# Allegro board KPRD_03v2.brd
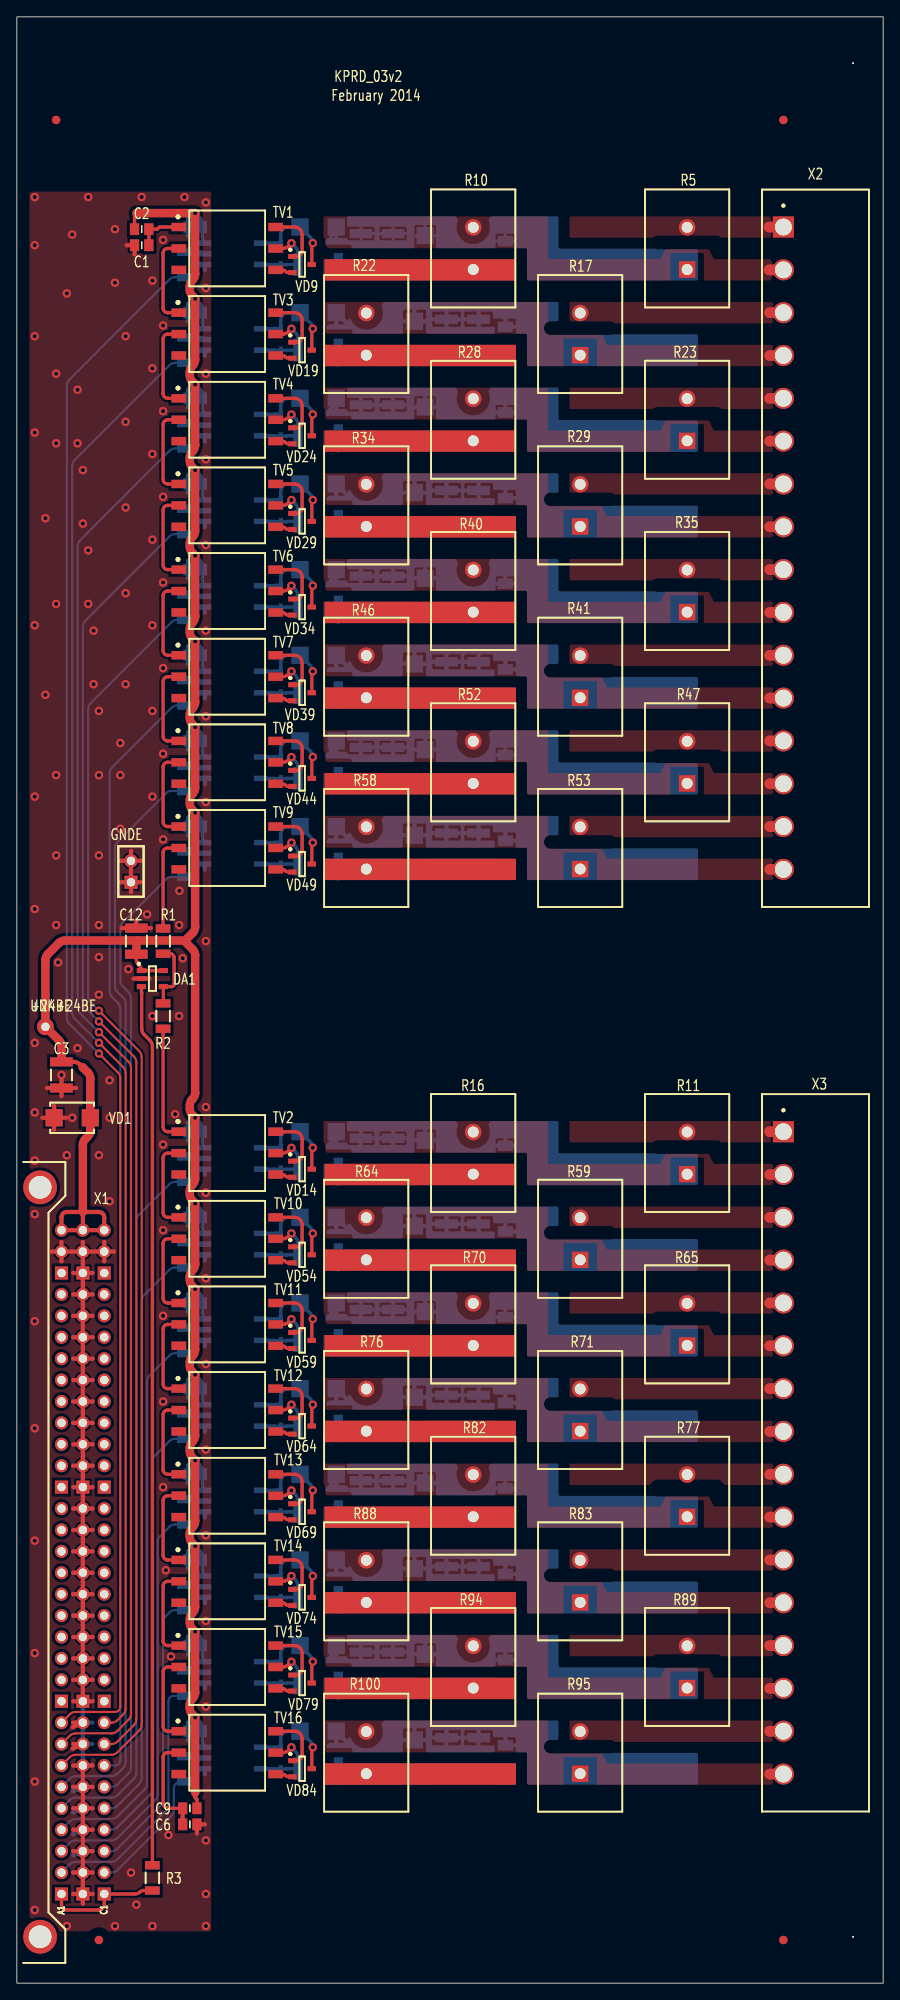
[diagram p0: board, top side]
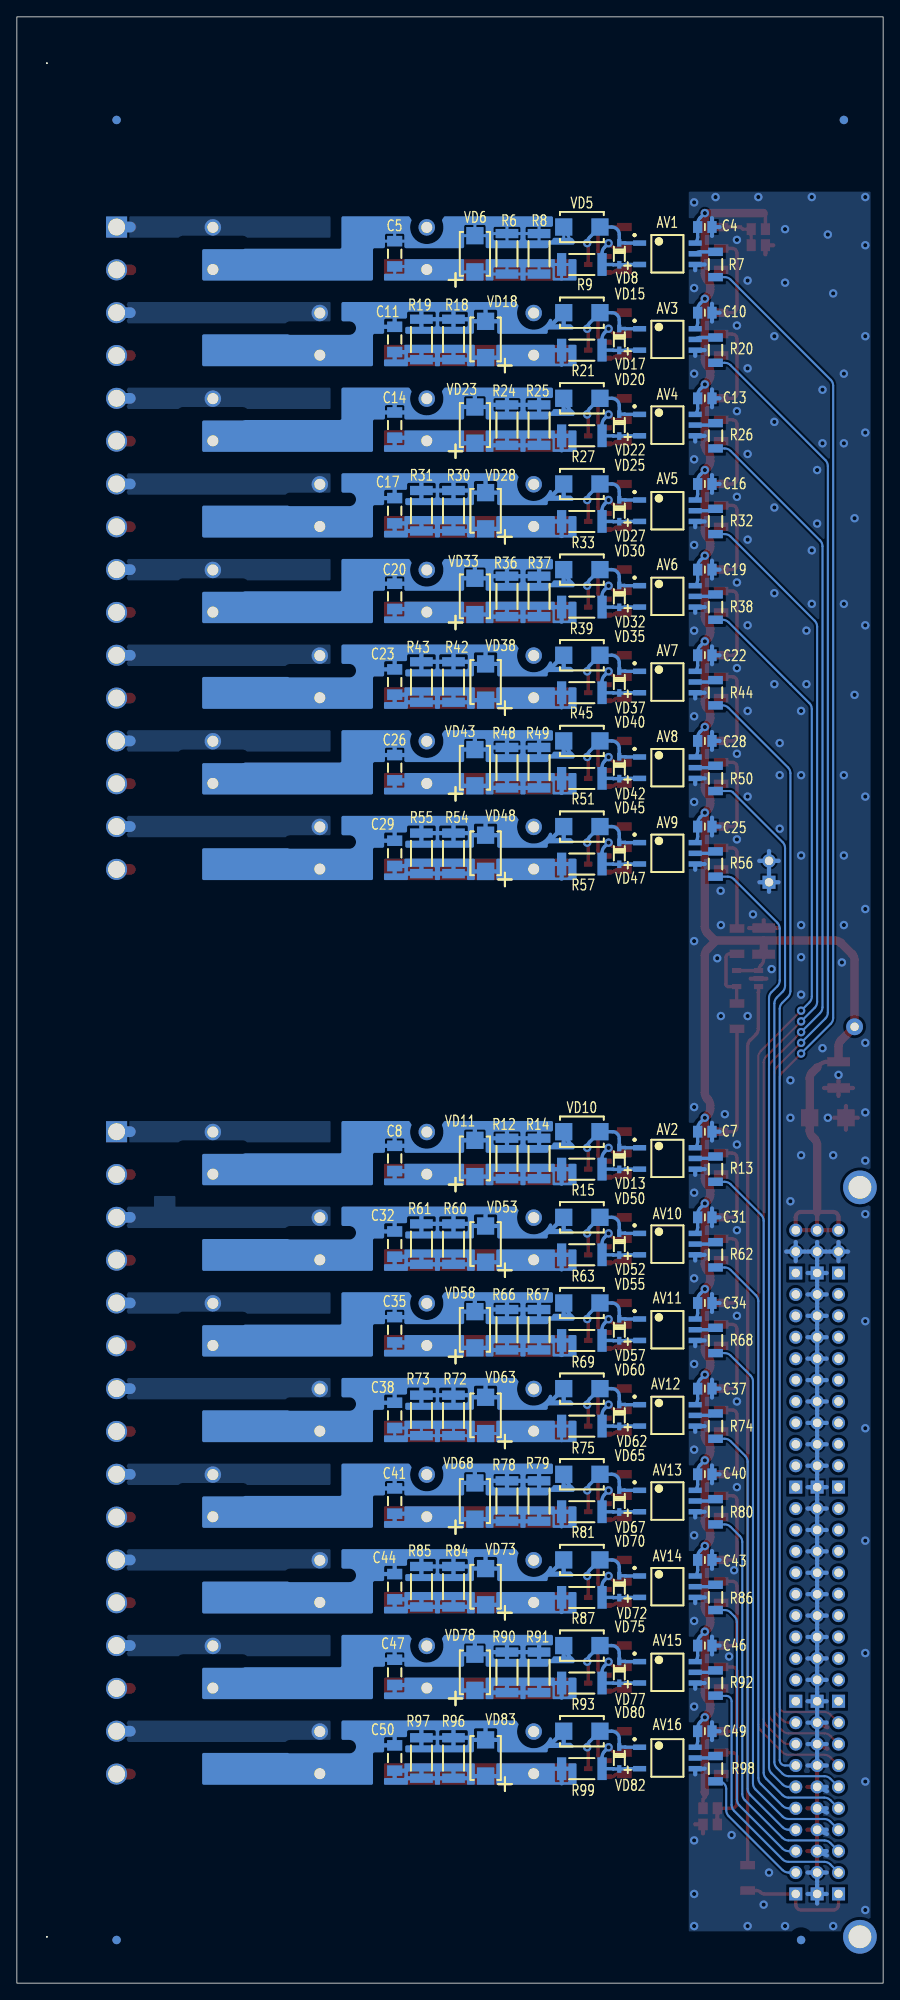
[diagram p1: board, bottom side, seen from below]

Outline 102.87 x 233.25 mm; copper layers: TOP, BOTTOM. Coordinates in mm from the lower left corner of the outline.
Outline path: rectangle 0,0 102.87,233.25

## Design rules (mm)
net group IN+: nets +IN1 +IN2 +IN3 +IN4 +IN5 +IN6 +IN7 +IN8 +IN9 +IN10 +IN11 +IN12 +IN13 +IN14 +IN15 +IN16
net group IN-: nets -IN1 -IN2 -IN3 -IN4 -IN5 -IN6 -IN7 -IN8 -IN9 -IN10 -IN11 -IN12 -IN13 -IN14 -IN15 -IN16
nets with their own width: min track width 0.4; nets +24BE

## Placement (name value [footprint] x y rotation side)
AV1  ACPL-M50L-500E  [SOIC127P650X260-5]  25.62 205.14 180 bottom
AV2  ACPL-M50L-500E  [SOIC127P650X260-5]  25.62 97.83 180 bottom
AV3  ACPL-M50L-500E  [SOIC127P650X260-5]  25.62 194.98 180 bottom
AV4  ACPL-M50L-500E  [SOIC127P650X260-5]  25.62 184.82 180 bottom
AV5  ACPL-M50L-500E  [SOIC127P650X260-5]  25.62 174.66 180 bottom
AV6  ACPL-M50L-500E  [SOIC127P650X260-5]  25.62 164.5 180 bottom
AV7  ACPL-M50L-500E  [SOIC127P650X260-5]  25.62 154.34 180 bottom
AV8  ACPL-M50L-500E  [SOIC127P650X260-5]  25.62 144.18 180 bottom
AV9  ACPL-M50L-500E  [SOIC127P650X260-5]  25.62 134.02 180 bottom
AV10  ACPL-M50L-500E  [SOIC127P650X260-5]  25.62 87.67 180 bottom
AV11  ACPL-M50L-500E  [SOIC127P650X260-5]  25.62 77.51 180 bottom
AV12  ACPL-M50L-500E  [SOIC127P650X260-5]  25.62 67.35 180 bottom
AV13  ACPL-M50L-500E  [SOIC127P650X260-5]  25.62 57.19 180 bottom
AV14  ACPL-M50L-500E  [SOIC127P650X260-5]  25.62 47.03 180 bottom
AV15  ACPL-M50L-500E  [SOIC127P650X260-5]  25.62 36.87 180 bottom
AV16  ACPL-M50L-500E  [SOIC127P650X260-5]  25.62 26.71 180 bottom
C1  0.1u  [CAPC2013X95N]  14.82 206.16 180 top
C2  0.1u  [CAPC2013X95N]  14.82 208.07 180 top
C3  10.0u  [CAPC3225X270N]  5.3 107.73 270 top
C4  0.1u  [CAPC2013X95N]  21.18 208.32 180 bottom
C5  0.1u  [CAPC3216X145N]  58 205.14 270 bottom
C6  0.1u  [CAPC2013X95N]  20.54 18.84 0 top
C7  0.1u  [CAPC2013X95N]  21.18 101 180 bottom
C8  0.1u  [CAPC3216X145N]  58 97.83 270 bottom
C9  0.1u  [CAPC2013X95N]  20.54 20.74 0 top
C10  0.1u  [CAPC2013X95N]  21.18 198.16 180 bottom
C11  0.1u  [CAPC3216X145N]  58 194.98 270 bottom
C12  10.0u  [CAPC3225X270N]  14.19 123.61 90 top
C13  0.1u  [CAPC2013X95N]  21.18 188 180 bottom
C14  0.1u  [CAPC3216X145N]  58 184.82 270 bottom
C16  0.1u  [CAPC2013X95N]  21.18 177.84 180 bottom
C17  0.1u  [CAPC3216X145N]  58 174.66 270 bottom
C19  0.1u  [CAPC2013X95N]  21.18 167.68 180 bottom
C20  0.1u  [CAPC3216X145N]  58 164.5 270 bottom
C22  0.1u  [CAPC2013X95N]  21.18 157.52 180 bottom
C23  0.1u  [CAPC3216X145N]  58 154.34 270 bottom
C25  0.1u  [CAPC2013X95N]  21.18 137.2 180 bottom
C26  0.1u  [CAPC3216X145N]  58 144.18 270 bottom
C28  0.1u  [CAPC2013X95N]  21.18 147.36 180 bottom
C29  0.1u  [CAPC3216X145N]  58 134.02 270 bottom
C31  0.1u  [CAPC2013X95N]  21.18 90.84 180 bottom
C32  0.1u  [CAPC3216X145N]  58 87.67 270 bottom
C34  0.1u  [CAPC2013X95N]  21.18 80.68 180 bottom
C35  0.1u  [CAPC3216X145N]  58 77.51 270 bottom
C37  0.1u  [CAPC2013X95N]  21.18 70.52 180 bottom
C38  0.1u  [CAPC3216X145N]  58 67.35 270 bottom
C40  0.1u  [CAPC2013X95N]  21.18 60.36 180 bottom
C41  0.1u  [CAPC3216X145N]  58 57.19 270 bottom
C43  0.1u  [CAPC2013X95N]  21.18 50.2 180 bottom
C44  0.1u  [CAPC3216X145N]  58 47.03 270 bottom
C46  0.1u  [CAPC2013X95N]  21.18 40.04 180 bottom
C47  0.1u  [CAPC3216X145N]  58 36.87 270 bottom
C49  0.1u  [CAPC2013X95N]  21.18 29.88 180 bottom
C50  0.1u  [CAPC3216X145N]  58 26.71 270 bottom
DA1  UCC27537  [SOT95P280X145-5N]  16.09 119.16 0 top
NOREF  -  [unnamed]  99.3 227.75 0 top
NOREF#2  -  [unnamed#2]  91.02 221.02 0 top
NOREF#3  -  [unnamed]  99.3 5.5 0 top
NOREF#4  -  [unnamed#2]  9.75 5.12 0 top
NOREF#5  -  [unnamed#2]  91.02 5.12 0 top
NOREF#6  -  [unnamed#2]  4.67 221.02 0 top
NOREF#7  -  [unnamed#2]  91.02 221.02 180 bottom
NOREF#8  -  [unnamed#2]  91.02 5.12 180 bottom
NOREF#9  -  [unnamed#2]  9.75 5.12 180 bottom
NOREF#10  -  [unnamed#2]  4.67 221.02 180 bottom
R1  200  [RESC3116X65N]  17.36 123.61 90 top
R2  200  [RESC3116X65N]  17.36 114.72 90 top
R3  200  [RESC3116X65N]  16.09 12.48 90 top
R5  5.1k  [RESV500P1300W900L2500H]  79.59 205.78 90 top
R6  1k  [RESC5025X65N]  44.67 205.14 90 bottom
R7  2k  [RESC3116X65N]  19.91 203.87 90 bottom
R8  1.2k  [RESC5025X65N]  40.86 205.14 90 bottom
R9  100  [RESC5025X65N]  35.78 203.87 0 bottom
R10  5.1k  [RESV500P1300W900L2500H]  54.2 205.78 90 top
R11  5.1k  [RESV500P1300W900L2500H]  79.59 98.46 90 top
R12  1k  [RESC5025X65N]  44.67 97.83 90 bottom
R13  2k  [RESC3116X65N]  19.91 96.56 90 bottom
R14  1.2k  [RESC5025X65N]  40.86 97.83 90 bottom
R15  100  [RESC5025X65N]  35.78 96.56 0 bottom
R16  5.1k  [RESV500P1300W900L2500H]  54.2 98.46 90 top
R17  5.1k  [RESV500P1300W900L2500H]  66.89 195.62 90 top
R18  1k  [RESC5025X65N]  51.02 194.98 90 bottom
R19  1.2k  [RESC5025X65N]  54.83 194.98 90 bottom
R20  2k  [RESC3116X65N]  19.91 193.71 90 bottom
R21  100  [RESC5025X65N]  35.78 193.71 0 bottom
R22  5.1k  [RESV500P1300W900L2500H]  41.49 195.62 90 top
R23  5.1k  [RESV500P1300W900L2500H]  79.59 185.46 90 top
R24  1k  [RESC5025X65N]  44.67 184.82 90 bottom
R25  1.2k  [RESC5025X65N]  40.86 184.82 90 bottom
R26  2k  [RESC3116X65N]  19.91 183.55 90 bottom
R27  100  [RESC5025X65N]  35.78 183.55 0 bottom
R28  5.1k  [RESV500P1300W900L2500H]  54.2 185.46 90 top
R29  5.1k  [RESV500P1300W900L2500H]  66.89 175.3 90 top
R30  1k  [RESC5025X65N]  51.02 174.66 90 bottom
R31  1.2k  [RESC5025X65N]  54.83 174.66 90 bottom
R32  2k  [RESC3116X65N]  19.91 173.39 90 bottom
R33  100  [RESC5025X65N]  35.78 173.39 0 bottom
R34  5.1k  [RESV500P1300W900L2500H]  41.49 175.3 90 top
R35  5.1k  [RESV500P1300W900L2500H]  79.59 165.14 90 top
R36  1k  [RESC5025X65N]  44.67 164.5 90 bottom
R37  1.2k  [RESC5025X65N]  40.86 164.5 90 bottom
R38  2k  [RESC3116X65N]  19.91 163.23 90 bottom
R39  100  [RESC5025X65N]  35.78 163.23 0 bottom
R40  5.1k  [RESV500P1300W900L2500H]  54.2 165.14 90 top
R41  5.1k  [RESV500P1300W900L2500H]  66.89 154.98 90 top
R42  1k  [RESC5025X65N]  51.02 154.34 90 bottom
R43  1.2k  [RESC5025X65N]  54.83 154.34 90 bottom
R44  2k  [RESC3116X65N]  19.91 153.07 90 bottom
R45  100  [RESC5025X65N]  35.78 153.07 0 bottom
R46  5.1k  [RESV500P1300W900L2500H]  41.49 154.98 90 top
R47  5.1k  [RESV500P1300W900L2500H]  79.59 144.82 90 top
R48  1k  [RESC5025X65N]  44.67 144.18 90 bottom
R49  1.2k  [RESC5025X65N]  40.86 144.18 90 bottom
R50  2k  [RESC3116X65N]  19.91 142.91 90 bottom
R51  100  [RESC5025X65N]  35.78 142.91 0 bottom
R52  5.1k  [RESV500P1300W900L2500H]  54.2 144.82 90 top
R53  5.1k  [RESV500P1300W900L2500H]  66.89 134.66 90 top
R54  1k  [RESC5025X65N]  51.02 134.02 90 bottom
R55  1.2k  [RESC5025X65N]  54.83 134.02 90 bottom
R56  2k  [RESC3116X65N]  19.91 132.75 90 bottom
R57  100  [RESC5025X65N]  35.78 132.75 0 bottom
R58  5.1k  [RESV500P1300W900L2500H]  41.49 134.66 90 top
R59  5.1k  [RESV500P1300W900L2500H]  66.89 88.3 90 top
R60  1k  [RESC5025X65N]  51.02 87.67 90 bottom
R61  1.2k  [RESC5025X65N]  54.83 87.67 90 bottom
R62  2k  [RESC3116X65N]  19.91 86.4 90 bottom
R63  100  [RESC5025X65N]  35.78 86.4 0 bottom
R64  5.1k  [RESV500P1300W900L2500H]  41.49 88.3 90 top
R65  5.1k  [RESV500P1300W900L2500H]  79.59 78.14 90 top
R66  1k  [RESC5025X65N]  44.67 77.51 90 bottom
R67  1.2k  [RESC5025X65N]  40.86 77.51 90 bottom
R68  2k  [RESC3116X65N]  19.91 76.24 90 bottom
R69  100  [RESC5025X65N]  35.78 76.24 0 bottom
R70  5.1k  [RESV500P1300W900L2500H]  54.2 78.14 90 top
R71  5.1k  [RESV500P1300W900L2500H]  66.89 67.98 90 top
R72  1k  [RESC5025X65N]  51.02 67.35 90 bottom
R73  1.2k  [RESC5025X65N]  54.83 67.35 90 bottom
R74  2k  [RESC3116X65N]  19.91 66.08 90 bottom
R75  100  [RESC5025X65N]  35.78 66.08 0 bottom
R76  5.1k  [RESV500P1300W900L2500H]  41.49 67.98 90 top
R77  5.1k  [RESV500P1300W900L2500H]  79.59 57.82 90 top
R78  1k  [RESC5025X65N]  44.67 57.19 90 bottom
R79  1.2k  [RESC5025X65N]  40.86 57.19 90 bottom
R80  2k  [RESC3116X65N]  19.91 55.92 90 bottom
R81  100  [RESC5025X65N]  35.78 55.92 0 bottom
R82  5.1k  [RESV500P1300W900L2500H]  54.2 57.82 90 top
R83  5.1k  [RESV500P1300W900L2500H]  66.89 47.66 90 top
R84  1k  [RESC5025X65N]  51.02 47.03 90 bottom
R85  1.2k  [RESC5025X65N]  54.83 47.03 90 bottom
R86  2k  [RESC3116X65N]  19.91 45.76 90 bottom
R87  100  [RESC5025X65N]  35.78 45.76 0 bottom
R88  5.1k  [RESV500P1300W900L2500H]  41.49 47.66 90 top
R89  5.1k  [RESV500P1300W900L2500H]  79.59 37.5 90 top
R90  1k  [RESC5025X65N]  44.67 36.87 90 bottom
R91  1.2k  [RESC5025X65N]  40.86 36.87 90 bottom
R92  2k  [RESC3116X65N]  19.91 35.6 90 bottom
R93  100  [RESC5025X65N]  35.78 35.6 0 bottom
R94  5.1k  [RESV500P1300W900L2500H]  54.2 37.5 90 top
R95  5.1k  [RESV500P1300W900L2500H]  66.89 27.34 90 top
R96  1k  [RESC5025X65N]  51.02 26.71 90 bottom
R97  1.2k  [RESC5025X65N]  54.83 26.71 90 bottom
R98  2k  [RESC3116X65N]  19.91 25.44 90 bottom
R99  100  [RESC5025X65N]  35.78 25.44 0 bottom
R100  5.1k  [RESV500P1300W900L2500H]  41.49 27.34 90 top
TV1  78253  [XFMR_78253MVC]  24.98 205.78 0 top
TV2  78253  [XFMR_78253MVC]  24.98 98.46 0 top
TV3  78253  [XFMR_78253MVC]  24.98 195.62 0 top
TV4  78253  [XFMR_78253MVC]  24.98 185.46 0 top
TV5  78253  [XFMR_78253MVC]  24.98 175.3 0 top
TV6  78253  [XFMR_78253MVC]  24.98 165.14 0 top
TV7  78253  [XFMR_78253MVC]  24.98 154.98 0 top
TV8  78253  [XFMR_78253MVC]  24.98 144.82 0 top
TV9  78253  [XFMR_78253MVC]  24.98 134.66 0 top
TV10  78253  [XFMR_78253MVC]  24.98 88.3 0 top
TV11  78253  [XFMR_78253MVC]  24.98 78.14 0 top
TV12  78253  [XFMR_78253MVC]  24.98 67.98 0 top
TV13  78253  [XFMR_78253MVC]  24.98 57.82 0 top
TV14  78253  [XFMR_78253MVC]  24.98 47.66 0 top
TV15  78253  [XFMR_78253MVC]  24.98 37.5 0 top
TV16  78253  [XFMR_78253MVC]  24.98 27.34 0 top
UNK+24BE  0.85mm  [MTG_085_200]  3.39 113.45 0 top
VD1  30B  [DIOM5236X261N_NP]  6.57 102.66 180 top
VD5  6.8B  [DIOM5236X261N_NP]  35.78 208.32 180 bottom
VD6  18B  [DIOM5236X261N]  48.48 205.14 270 bottom
VD8  1N4148WS  [SOD2513X100N]  31.34 205.14 270 bottom
VD9  BAT54C  [SOT95P230X110-3N]  33.88 203.87 0 top
VD10  6.8B  [DIOM5236X261N_NP]  35.78 101 180 bottom
VD11  18B  [DIOM5236X261N]  48.48 97.83 270 bottom
VD13  1N4148WS  [SOD2513X100N]  31.34 97.83 270 bottom
VD14  BAT54C  [SOT95P230X110-3N]  33.88 96.56 0 top
VD15  6.8B  [DIOM5236X261N_NP]  35.78 198.16 180 bottom
VD17  1N4148WS  [SOD2513X100N]  31.34 194.98 270 bottom
VD18  18B  [DIOM5236X261N]  47.21 194.98 270 bottom
VD19  BAT54C  [SOT95P230X110-3N]  33.88 193.71 0 top
VD20  6.8B  [DIOM5236X261N_NP]  35.78 188 180 bottom
VD22  1N4148WS  [SOD2513X100N]  31.34 184.82 270 bottom
VD23  18B  [DIOM5236X261N]  48.48 184.82 270 bottom
VD24  BAT54C  [SOT95P230X110-3N]  33.88 183.55 0 top
VD25  6.8B  [DIOM5236X261N_NP]  35.78 177.84 180 bottom
VD27  1N4148WS  [SOD2513X100N]  31.34 174.66 270 bottom
VD28  18B  [DIOM5236X261N]  47.21 174.66 270 bottom
VD29  BAT54C  [SOT95P230X110-3N]  33.88 173.39 0 top
VD30  6.8B  [DIOM5236X261N_NP]  35.78 167.68 180 bottom
VD32  1N4148WS  [SOD2513X100N]  31.34 164.5 270 bottom
VD33  18B  [DIOM5236X261N]  48.48 164.5 270 bottom
VD34  BAT54C  [SOT95P230X110-3N]  33.88 163.23 0 top
VD35  6.8B  [DIOM5236X261N_NP]  35.78 157.52 180 bottom
VD37  1N4148WS  [SOD2513X100N]  31.34 154.34 270 bottom
VD38  18B  [DIOM5236X261N]  47.21 154.34 270 bottom
VD39  BAT54C  [SOT95P230X110-3N]  33.88 153.07 0 top
VD40  6.8B  [DIOM5236X261N_NP]  35.78 147.36 180 bottom
VD42  1N4148WS  [SOD2513X100N]  31.34 144.18 270 bottom
VD43  18B  [DIOM5236X261N]  48.48 144.18 270 bottom
VD44  BAT54C  [SOT95P230X110-3N]  33.88 142.91 0 top
VD45  6.8B  [DIOM5236X261N_NP]  35.78 137.2 180 bottom
VD47  1N4148WS  [SOD2513X100N]  31.34 134.02 270 bottom
VD48  18B  [DIOM5236X261N]  47.21 134.02 270 bottom
VD49  BAT54C  [SOT95P230X110-3N]  33.88 132.75 0 top
VD50  6.8B  [DIOM5236X261N_NP]  35.78 90.84 180 bottom
VD52  1N4148WS  [SOD2513X100N]  31.34 87.67 270 bottom
VD53  18B  [DIOM5236X261N]  47.21 87.67 270 bottom
VD54  BAT54C  [SOT95P230X110-3N]  33.88 86.4 0 top
VD55  6.8B  [DIOM5236X261N_NP]  35.78 80.68 180 bottom
VD57  1N4148WS  [SOD2513X100N]  31.34 77.51 270 bottom
VD58  18B  [DIOM5236X261N]  48.48 77.51 270 bottom
VD59  BAT54C  [SOT95P230X110-3N]  33.88 76.24 0 top
VD60  6.8B  [DIOM5236X261N_NP]  35.78 70.52 180 bottom
VD62  1N4148WS  [SOD2513X100N]  31.34 67.35 270 bottom
VD63  18B  [DIOM5236X261N]  47.21 67.35 270 bottom
VD64  BAT54C  [SOT95P230X110-3N]  33.88 66.08 0 top
VD65  6.8B  [DIOM5236X261N_NP]  35.78 60.36 180 bottom
VD67  1N4148WS  [SOD2513X100N]  31.34 57.19 270 bottom
VD68  18B  [DIOM5236X261N]  48.48 57.19 270 bottom
VD69  BAT54C  [SOT95P230X110-3N]  33.88 55.92 0 top
VD70  6.8B  [DIOM5236X261N_NP]  35.78 50.2 180 bottom
VD72  1N4148WS  [SOD2513X100N]  31.34 47.03 270 bottom
VD73  18B  [DIOM5236X261N]  47.21 47.03 270 bottom
VD74  BAT54C  [SOT95P230X110-3N]  33.88 45.76 0 top
VD75  6.8B  [DIOM5236X261N_NP]  35.78 40.04 180 bottom
VD77  1N4148WS  [SOD2513X100N]  31.34 36.87 270 bottom
VD78  18B  [DIOM5236X261N]  48.48 36.87 270 bottom
VD79  BAT54C  [SOT95P230X110-3N]  33.88 35.6 0 top
VD80  6.8B  [DIOM5236X261N_NP]  35.78 29.88 180 bottom
VD82  1N4148WS  [SOD2513X100N]  31.34 26.71 270 bottom
VD83  18B  [DIOM5236X261N]  47.21 26.71 270 bottom
VD84  BAT54C  [SOT95P230X110-3N]  33.88 25.44 0 top
X1  DIN-32x3  [DIN_41612_96_MR]  2.12 49.95 0 top
X2  231-576/001-000  [WAGO_231_576_001_000]  94.83 170.22 0 top
X3  231-576/001-000  [WAGO_231_576_001_000]  94.83 62.9 0 top
X4  GNDE  [HDRV1X2P254]  13.55 131.87 90 top

## Library data of the parts
AV1-AV16 = ACPL-M50L
C1-C14 C16 C17 C19 C20 C22 C23 C25 C26 C28 C29 C31 C32 C34 C35 C37 C38 C40 C41 C43 C44 C46 C47 C49 C50 = CAP_NP
DA1 = UCC27537
R1-R3 R7 R13 R20 R26 R32 R38 R44 R50 R56 R62 R68 R74 R80 R86 R92 R98 = RES_0.25W
R5 R10 R11 R16 R17 R22 R23 R28 R29 R34 R35 R40 R41 R46 R47 R52 R53 R58 R59 R64 R65 R70 R71 R76 R77 R82 R83 R88 R89 R94 R95 R100 = RES_5W
R6 R8 R9 R12 R14 R15 R18 R19 R21 R24 R25 R27 R30 R31 R33 R36 R37 R39 R42 R43 R45 R48 R49 R51 R54 R55 R57 R60 R61 R63 R66 R67 R69 R72 R73 R75 R78 R79 R81 R84 R85 R87 R90 R91 R93 R96 R97 R99 = RES_0.5W
TV1-TV16 = 78253
UNK+24BE = MOUNTING_HOLE_PLATED
VD1 VD5 VD10 VD15 VD20 VD25 VD30 VD35 VD40 VD45 VD50 VD55 VD60 VD65 VD70 VD75 VD80 = DIODE_TVS_BI
VD6 VD11 VD18 VD23 VD28 VD33 VD38 VD43 VD48 VD53 VD58 VD63 VD68 VD73 VD78 VD83 = DIODE_TVS_UNI
VD8 VD13 VD17 VD22 VD27 VD32 VD37 VD42 VD47 VD52 VD57 VD62 VD67 VD72 VD77 VD82 = DIODE
VD9 VD14 VD19 VD24 VD29 VD34 VD39 VD44 VD49 VD54 VD59 VD64 VD69 VD74 VD79 VD84 = DIODE_SCHOTTKY_DUAL_C
X1 = CON_32X3
X2 X3 = CON_16
X4 = CON_2

## Footprints (pads in the part's own frame, mm; a bottom-side part is the same pattern mirrored in y, then rotated)
CAPC2013X95N
  rect 1.1x1.4 smd: 1(-0.85,0) 2(0.85,0)
CAPC3216X145N
  rect 1.25x1.8 smd: 1(-1.5,0) 2(1.5,0)
CAPC3225X270N
  rect 1.1x2.7 smd: 1(-1.55,0) 2(1.55,0)
DIN_41612_96_MR
  rect 1.55x1.55 hole 1: A1(3.175,-39.37) A10(3.175,-16.51) A20(3.175,8.89) A30(3.175,34.29) B1(5.715,-39.37) B10(5.715,-16.51) B20(5.715,8.89) B30(5.715,34.29) C1(8.255,-39.37) C10(8.255,-16.51) C20(8.255,8.89) C30(8.255,34.29)
  round 1.55 hole 1: A2(3.175,-36.83) A3(3.175,-34.29) A4(3.175,-31.75) A5(3.175,-29.21) A6(3.175,-26.67) A7(3.175,-24.13) A8(3.175,-21.59) A9(3.175,-19.05) A11(3.175,-13.97) A12(3.175,-11.43) A13(3.175,-8.89) A14(3.175,-6.35) A15(3.175,-3.81) A16(3.175,-1.27) A17(3.175,1.27) A18(3.175,3.81) A19(3.175,6.35) A21(3.175,11.43) A22(3.175,13.97) A23(3.175,16.51) A24(3.175,19.05) A25(3.175,21.59) A26(3.175,24.13) A27(3.175,26.67) A28(3.175,29.21) A29(3.175,31.75) A31(3.175,36.83) A32(3.175,39.37) B2(5.715,-36.83) B3(5.715,-34.29) B4(5.715,-31.75) B5(5.715,-29.21) B6(5.715,-26.67) B7(5.715,-24.13) B8(5.715,-21.59) B9(5.715,-19.05) B11(5.715,-13.97) B12(5.715,-11.43) B13(5.715,-8.89) B14(5.715,-6.35) B15(5.715,-3.81) B16(5.715,-1.27) B17(5.715,1.27) B18(5.715,3.81) B19(5.715,6.35) B21(5.715,11.43) B22(5.715,13.97) B23(5.715,16.51) B24(5.715,19.05) B25(5.715,21.59) B26(5.715,24.13) B27(5.715,26.67) B28(5.715,29.21) B29(5.715,31.75) B31(5.715,36.83) B32(5.715,39.37) C2(8.255,-36.83) C3(8.255,-34.29) C4(8.255,-31.75) C5(8.255,-29.21) C6(8.255,-26.67) C7(8.255,-24.13) C8(8.255,-21.59) C9(8.255,-19.05) C11(8.255,-13.97) C12(8.255,-11.43) C13(8.255,-8.89) C14(8.255,-6.35) C15(8.255,-3.81) C16(8.255,-1.27) C17(8.255,1.27) C18(8.255,3.81) C19(8.255,6.35) C21(8.255,11.43) C22(8.255,13.97) C23(8.255,16.51) C24(8.255,19.05) C25(8.255,21.59) C26(8.255,24.13) C27(8.255,26.67) C28(8.255,29.21) C29(8.255,31.75) C31(8.255,36.83) C32(8.255,39.37)
  round 4 hole 2.7: HOLE1(0.635,-44.45) HOLE2(0.635,44.45)
DIOM5236X261N
  rect 2.05x2.05 smd: A(2.15,0) C(-2.15,0)
DIOM5236X261N_NP
  rect 2.05x2.05 smd: A(2.15,0) C(-2.15,0)
HDRV1X2P254
  rect 1.55x1.55 hole 1: 1(-1.27,0)
  round 1.6 hole 1: 2(1.27,0)
MTG_085_200
  round 2 hole 1: 1(0,0)
RESC3116X65N
  rect 1x1.75 smd: 1(-1.5,0) 2(1.5,0)
RESC5025X65N
  rect 1.1x2.7 smd: 1(-2.4,0) 2(2.4,0)
RESV500P1300W900L2500H
  rect 1.95x1.95 hole 1.3: 1(-2.5,0)
  round 1.95 hole 1.3: 2(2.5,0)
SOD2513X100N
  rect 0.9x0.5 smd: A(1.3,0) C(-1.3,0)
SOIC127P650X260-5
  rect 1.55x0.65 smd: 1(-3.3,1.27) 3(-3.3,-1.27) 4(3.3,-1.27) 5(3.3,0) 6(3.3,1.27)
SOT95P230X110-3N
  rect 1x0.6 smd: 1(-1.15,0.95) 2(-1.15,-0.95) 3(1.15,0)
SOT95P280X145-5N
  rect 1.1x0.6 smd: 1(-1.3,0.95) 2(-1.3,0) 3(-1.3,-0.95) 4(1.3,-0.95) 5(1.3,0.95)
unnamed
  round 0.2 hole 2.7 unplated: (0,0)
unnamed#2
  round 1 smd: (0,0)
WAGO_231_576_001_000
  rect 2.5x2.5 hole 2: 1(-3.81,38.1)
  round 2.5 hole 2: 2(-3.81,33.02) 3(-3.81,27.94) 4(-3.81,22.86) 5(-3.81,17.78) 6(-3.81,12.7) 7(-3.81,7.62) 8(-3.81,2.54) 9(-3.81,-2.54) 10(-3.81,-7.62) 11(-3.81,-12.7) 12(-3.81,-17.78) 13(-3.81,-22.86) 14(-3.81,-27.94) 15(-3.81,-33.02) 16(-3.81,-38.1)
XFMR_78253MVC
  rect 1.75x1 smd: 1(-5.75,2.54) 2(-5.75,0) 3(-5.75,-2.54) 4(5.75,-2.54) 5(5.75,0) 6(5.75,2.54)

## Nets
GNDE: AV1.4 AV2.4 AV3.4 AV4.4 AV5.4 AV6.4 AV7.4 AV8.4 AV9.4 AV10.4 AV11.4 AV12.4 AV13.4 AV14.4 AV15.4 AV16.4 C1.2 C3.2 C4.2 C6.2 C7.2 C10.2 C12.2 C13.2 C16.2 C19.2 C22.2 C25.2 C28.2 C31.2 C34.2 C37.2 C40.2 C43.2 C46.2 C49.2 DA1.2(GND) VD1.A X1.A31 X1.B1 X1.B2 X1.B3 X1.B4 X1.B5 X1.B6 X1.B7 X1.B8 X1.B9 X1.B10 X1.B11 X1.B12 X1.B13 X1.B14 X1.B15 X1.B16 X1.B17 X1.B18 X1.B19 X1.B20 X1.B21 X1.B22 X1.B23 X1.B24 X1.B25 X1.B26 X1.B27 X1.B28 X1.B29 X1.B30 X1.B31 X1.C31 X4.1 X4.2
+24BE: AV1.6 AV2.6 AV3.6 AV4.6 AV5.6 AV6.6 AV7.6 AV8.6 AV9.6 AV10.6 AV11.6 AV12.6 AV13.6 AV14.6 AV15.6 AV16.6 C2.2 C3.1 C4.1 C7.1 C9.2 C10.1 C12.1 C13.1 C16.1 C19.1 C22.1 C25.1 C28.1 C31.1 C34.1 C37.1 C40.1 C43.1 C46.1 C49.1 DA1.1(EN) DA1.5(VDD) UNK+24BE.1 VD1.C X1.A32 X1.B32 X1.C32
+IN1: R5.2 X2.1
+IN2: R17.2 X2.3
+IN3: R23.2 X2.5
+IN4: R29.2 X2.7
+IN5: R35.2 X2.9
+IN6: R41.2 X2.11
+IN7: R47.2 X2.13
+IN8: R53.2 X2.15
+IN9: R11.2 X3.1
+IN10: R59.2 X3.3
+IN11: R65.2 X3.5
+IN12: R71.2 X3.7
+IN13: R77.2 X3.9
+IN14: R83.2 X3.11
+IN15: R89.2 X3.13
+IN16: R95.2 X3.15
-IN1: R10.2 X2.2
-IN2: R22.2 X2.4
-IN3: R28.2 X2.6
-IN4: R34.2 X2.8
-IN5: R40.2 X2.10
-IN6: R46.2 X2.12
-IN7: R52.2 X2.14
-IN8: R58.2 X2.16
-IN9: R16.2 X3.2
-IN10: R64.2 X3.4
-IN11: R70.2 X3.6
-IN12: R76.2 X3.8
-IN13: R82.2 X3.10
-IN14: R88.2 X3.12
-IN15: R94.2 X3.14
-IN16: R100.2 X3.16
_IN+_A1: C5.1 R5.1 R6.2 R8.2 VD5.C VD6.C
_IN+_A1_B1: C11.1 R17.1 R18.2 R19.2 VD15.C VD18.C
_IN+_A1_B2: C29.1 R53.1 R54.2 R55.2 VD45.C VD48.C
_IN+_A1_B8: C14.1 R23.1 R24.2 R25.2 VD20.C VD23.C
_IN+_A1_B9: C17.1 R29.1 R30.2 R31.2 VD25.C VD28.C
_IN+_A1_B10: C20.1 R35.1 R36.2 R37.2 VD30.C VD33.C
_IN+_A1_B11: C23.1 R41.1 R42.2 R43.2 VD35.C VD38.C
_IN+_A1_B12: C26.1 R47.1 R48.2 R49.2 VD40.C VD43.C
_IN+_A2: C8.1 R11.1 R12.2 R14.2 VD10.C VD11.C
_IN+_A2_B1: C32.1 R59.1 R60.2 R61.2 VD50.C VD53.C
_IN+_A2_B2: C50.1 R95.1 R96.2 R97.2 VD80.C VD83.C
_IN+_A2_B8: C35.1 R65.1 R66.2 R67.2 VD55.C VD58.C
_IN+_A2_B9: C38.1 R71.1 R72.2 R73.2 VD60.C VD63.C
_IN+_A2_B10: C41.1 R77.1 R78.2 R79.2 VD65.C VD68.C
_IN+_A2_B11: C44.1 R83.1 R84.2 R85.2 VD70.C VD73.C
_IN+_A2_B12: C47.1 R89.1 R90.2 R91.2 VD75.C VD78.C
_IN-_A1: C5.2 R6.1 R8.1 R9.2 R10.1 VD6.A
_IN-_A1_B1: C11.2 R18.1 R19.1 R21.2 R22.1 VD18.A
_IN-_A1_B2: C29.2 R54.1 R55.1 R57.2 R58.1 VD48.A
_IN-_A1_B8: C14.2 R24.1 R25.1 R27.2 R28.1 VD23.A
_IN-_A1_B9: C17.2 R30.1 R31.1 R33.2 R34.1 VD28.A
_IN-_A1_B10: C20.2 R36.1 R37.1 R39.2 R40.1 VD33.A
_IN-_A1_B11: C23.2 R42.1 R43.1 R45.2 R46.1 VD38.A
_IN-_A1_B12: C26.2 R48.1 R49.1 R51.2 R52.1 VD43.A
_IN-_A2: C8.2 R12.1 R14.1 R15.2 R16.1 VD11.A
_IN-_A2_B1: C32.2 R60.1 R61.1 R63.2 R64.1 VD53.A
_IN-_A2_B2: C50.2 R96.1 R97.1 R99.2 R100.1 VD83.A
_IN-_A2_B8: C35.2 R66.1 R67.1 R69.2 R70.1 VD58.A
_IN-_A2_B9: C38.2 R72.1 R73.1 R75.2 R76.1 VD63.A
_IN-_A2_B10: C41.2 R78.1 R79.1 R81.2 R82.1 VD68.A
_IN-_A2_B11: C44.2 R84.1 R85.1 R87.2 R88.1 VD73.A
_IN-_A2_B12: C47.2 R90.1 R91.1 R93.2 R94.1 VD78.A
COMI0: R7.1 X1.A9
COMI1: R20.1 X1.C9
COMI2: R26.1 X1.A8
COMI3: R32.1 X1.C8
COMI4: R38.1 X1.A7
COMI5: R44.1 X1.C7
COMI6: R50.1 X1.A6
COMI7: R56.1 X1.C6
COMI8: R13.1 X1.A5
COMI9: R62.1 X1.C5
COMI10: R68.1 X1.A4
COMI11: R74.1 X1.C4
COMI12: R80.1 X1.A3
COMI13: R86.1 X1.C3
COMI14: R92.1 X1.A2
COMI15: R98.1 X1.C2
KCOMI: R3.1 X1.A1 X1.C1
N480618_A1: AV1.5 R7.2
N480618_A2: AV2.5 R13.2
N480650_A1: AV1.1 VD5.A VD8.C VD9.3(M)
N480650_A2: AV2.1 VD10.A VD13.C VD14.3(M)
N480654_A1: AV1.3 R9.1 TV1.5 VD8.A
N480654_A2: AV2.3 R15.1 TV2.5 VD13.A
N480782_A1: TV1.6 VD9.1(A1)
N480782_A2: TV2.6 VD14.1(A1)
N480786_A1: TV1.4 VD9.2(A2)
N480786_A2: TV2.4 VD14.2(A2)
N481190_A1: TV3.2 TV4.1
N481190_A2: TV10.2 TV11.1
N481194_A1: TV4.2 TV5.1
N481194_A2: TV11.2 TV12.1
N481198_A1: TV5.2 TV6.1
N481198_A2: TV12.2 TV13.1
N481202_A1: TV6.2 TV7.1
N481202_A2: TV13.2 TV14.1
N481206_A1: TV7.2 TV8.1
N481206_A2: TV14.2 TV15.1
N481210_A1: TV8.2 TV9.1
N481210_A2: TV15.2 TV16.1
N482214_A1_B1: AV3.5 R20.2
N482214_A1_B2: AV9.5 R56.2
N482214_A1_B8: AV4.5 R26.2
N482214_A1_B9: AV5.5 R32.2
N482214_A1_B10: AV6.5 R38.2
N482214_A1_B11: AV7.5 R44.2
N482214_A1_B12: AV8.5 R50.2
N482214_A2_B1: AV10.5 R62.2
N482214_A2_B2: AV16.5 R98.2
N482214_A2_B8: AV11.5 R68.2
N482214_A2_B9: AV12.5 R74.2
N482214_A2_B10: AV13.5 R80.2
N482214_A2_B11: AV14.5 R86.2
N482214_A2_B12: AV15.5 R92.2
N482246_A1_B1: AV3.1 VD15.A VD17.C VD19.3(M)
N482246_A1_B2: AV9.1 VD45.A VD47.C VD49.3(M)
N482246_A1_B8: AV4.1 VD20.A VD22.C VD24.3(M)
N482246_A1_B9: AV5.1 VD25.A VD27.C VD29.3(M)
N482246_A1_B10: AV6.1 VD30.A VD32.C VD34.3(M)
N482246_A1_B11: AV7.1 VD35.A VD37.C VD39.3(M)
N482246_A1_B12: AV8.1 VD40.A VD42.C VD44.3(M)
N482246_A2_B1: AV10.1 VD50.A VD52.C VD54.3(M)
N482246_A2_B2: AV16.1 VD80.A VD82.C VD84.3(M)
N482246_A2_B8: AV11.1 VD55.A VD57.C VD59.3(M)
N482246_A2_B9: AV12.1 VD60.A VD62.C VD64.3(M)
N482246_A2_B10: AV13.1 VD65.A VD67.C VD69.3(M)
N482246_A2_B11: AV14.1 VD70.A VD72.C VD74.3(M)
N482246_A2_B12: AV15.1 VD75.A VD77.C VD79.3(M)
N482250_A1_B1: AV3.3 R21.1 TV3.5 VD17.A
N482250_A1_B2: AV9.3 R57.1 TV9.5 VD47.A
N482250_A1_B8: AV4.3 R27.1 TV4.5 VD22.A
N482250_A1_B9: AV5.3 R33.1 TV5.5 VD27.A
N482250_A1_B10: AV6.3 R39.1 TV6.5 VD32.A
N482250_A1_B11: AV7.3 R45.1 TV7.5 VD37.A
N482250_A1_B12: AV8.3 R51.1 TV8.5 VD42.A
N482250_A2_B1: AV10.3 R63.1 TV10.5 VD52.A
N482250_A2_B2: AV16.3 R99.1 TV16.5 VD82.A
N482250_A2_B8: AV11.3 R69.1 TV11.5 VD57.A
N482250_A2_B9: AV12.3 R75.1 TV12.5 VD62.A
N482250_A2_B10: AV13.3 R81.1 TV13.5 VD67.A
N482250_A2_B11: AV14.3 R87.1 TV14.5 VD72.A
N482250_A2_B12: AV15.3 R93.1 TV15.5 VD77.A
N482394_A1_B1: TV3.6 VD19.1(A1)
N482394_A1_B2: TV9.6 VD49.1(A1)
N482394_A1_B8: TV4.6 VD24.1(A1)
N482394_A1_B9: TV5.6 VD29.1(A1)
N482394_A1_B10: TV6.6 VD34.1(A1)
N482394_A1_B11: TV7.6 VD39.1(A1)
N482394_A1_B12: TV8.6 VD44.1(A1)
N482394_A2_B1: TV10.6 VD54.1(A1)
N482394_A2_B2: TV16.6 VD84.1(A1)
N482394_A2_B8: TV11.6 VD59.1(A1)
N482394_A2_B9: TV12.6 VD64.1(A1)
N482394_A2_B10: TV13.6 VD69.1(A1)
N482394_A2_B11: TV14.6 VD74.1(A1)
N482394_A2_B12: TV15.6 VD79.1(A1)
N482398_A1_B1: TV3.4 VD19.2(A2)
N482398_A1_B2: TV9.4 VD49.2(A2)
N482398_A1_B8: TV4.4 VD24.2(A2)
N482398_A1_B9: TV5.4 VD29.2(A2)
N482398_A1_B10: TV6.4 VD34.2(A2)
N482398_A1_B11: TV7.4 VD39.2(A2)
N482398_A1_B12: TV8.4 VD44.2(A2)
N482398_A2_B1: TV10.4 VD54.2(A2)
N482398_A2_B2: TV16.4 VD84.2(A2)
N482398_A2_B8: TV11.4 VD59.2(A2)
N482398_A2_B9: TV12.4 VD64.2(A2)
N482398_A2_B10: TV13.4 VD69.2(A2)
N482398_A2_B11: TV14.4 VD74.2(A2)
N482398_A2_B12: TV15.4 VD79.2(A2)
TEST: DA1.4(OUT) R1.1 R2.2
TO__A1: TV1.2 TV3.1
TO__A2: TV2.2 TV10.1
N478797: C1.1 C2.1 TV1.1
N491974: DA1.3(IN) R3.2
N516362: R1.2 TV9.2
N516674: R2.1 TV2.1
N524867: C6.1 C9.1 TV16.2

Pads without a net: TV1 3; TV2 3; TV3 3; TV4 3; TV5 3; TV6 3; TV7 3; TV8 3; TV9 3; TV10 3; TV11 3; TV12 3; TV13 3; TV14 3; TV15 3; TV16 3; X1 A10 A11 A12 A13 A14 A15 A16 A17 A18 A19 A20 A21 A22 A23 A24 A25 A26 A27 A28 A29 A30 C10 C11 C12 C13 C14 C15 C16 C17 C18 C19 C20 C21 C22 C23 C24 C25 C26 C27 C28 C29 C30 HOLE1 HOLE2

## Via types
v1: diameter 1, hole 0.5, TOP to BOTTOM, 172 vias

## Routing (per net, layer and track width the routed paths; a pad name or vN(x,y) marks a point on that pad's centre or on a via; arc(x,y) is an arc through that point)
GNDE: length 400.1
  TOP w0.5: X1.B30 7.84,85.39 ; X1.B30 8.99,84.24 ; X1.B30 6.69,84.24 ; X1.B30 7.84,83.09 ; C12.2 15.92,125.16 ; C12.2 14.19,126.09 ; C12.2 12.46,125.16 ; 6.69,66.46 X1.B23 ; X1.B23 8.99,66.46 ; X1.B23 7.84,67.61 ; X1.B23 7.84,65.31 ; 12.38,133.14 13.55,133.14 ; 13.55,133.14 13.55,131.96 ; 13.55,133.14 14.73,133.14 ; 13.55,133.14 13.55,134.31 ; X1.B21 7.84,62.53 ; X1.B21 7.84,60.23 ; X1.B21 8.99,61.38 ; X1.B21 6.69,61.38 ; 6.69,81.7 X1.B29 ; X1.B29 7.84,82.85 ; X1.B29 8.99,81.7 ; X1.B29 7.84,80.55 ; 6.69,38.52 X1.B12 ; X1.B12 8.99,38.52 ; X1.B12 7.84,39.67 ; X1.B12 7.84,37.37 ; X1.B20 8.99,58.84 ; X1.B20 7.84,59.99 ; X1.B20 7.84,57.69 ; X1.B20 6.69,58.84 ; X1.B25 8.99,71.54 ; X1.B25 7.84,70.39 ; X1.B25 7.84,72.69 ; X1.B25 6.69,71.54 ; X1.B6 8.99,23.28 ; X1.B6 7.84,22.13 ; X1.B6 6.69,23.28 ; X1.B6 7.84,24.43 ; 13.55,129.44 X4.1 ; X4.1 13.55,131.75 ; X4.1 14.71,130.59 ; X4.1 12.4,130.59 ; X1.B22 7.84,65.07 ; X1.B22 8.99,63.92 ; X1.B22 6.69,63.92 ; X1.B22 7.84,62.77 ; X1.B26 7.84,75.23 ; X1.B26 8.99,74.08 ; X1.B26 6.69,74.08 ; X1.B26 7.84,72.93 ; X1.B19 8.99,56.3 ; X1.B19 7.84,57.45 ; X1.B19 6.69,56.3 ; X1.B19 7.84,55.15 ; 6.69,46.14 X1.B15 ; X1.B15 7.84,47.29 ; X1.B15 7.84,44.99 ; X1.B15 8.99,46.14 ; X1.B31 7.84,87.93 ; X1.B31 8.99,86.78 ; X1.B31 7.84,85.63 ; X1.B31 6.69,86.78 ; 7.84,24.67 X1.B7 ; X1.B7 6.69,25.82 ; X1.B7 8.99,25.82 ; 10.38,85.63 X1.C31 ; X1.C31 11.53,86.78 ; X1.C31 9.23,86.78 ; X1.C31 10.38,87.93 ; 6.69,48.68 X1.B16 ; X1.B16 7.84,47.53 ; X1.B16 8.99,48.68 ; X1.B16 7.84,49.83 ; 6.63,27.81 X1.B8 6.69,28.36 ; X1.B27 8.99,76.62 ; X1.B27 7.84,77.77 ; X1.B27 6.69,76.62 ; X1.B27 7.84,75.47 ; 7.84,50.07 X1.B17 ; X1.B17 7.84,52.37 ; X1.B17 8.99,51.22 ; X1.B17 6.69,51.22 ; 13.87,119.16 DA1.2 15.72,119.16 ; 6.69,30.9 X1.B9 6.63,30.35 ; X1.B5 8.99,20.74 ; X1.B5 7.84,19.59 ; X1.B5 6.69,20.74 ; X1.B5 7.84,21.89 ; X1.B3 7.84,16.81 ; X1.B3 7.84,14.51 ; X1.B3 6.69,15.66 ; X1.B3 8.99,15.66 ; 22.32,18.84 C6.2 21.39,17.76 ; X1.B18 8.99,53.76 ; X1.B18 6.69,53.76 ; X1.B18 7.84,54.91 ; X1.B18 7.84,52.61 ; 6.69,13.12 X1.B2 ; X1.B2 7.84,11.97 ; X1.B2 8.99,13.12 ; X1.B2 7.84,14.27 ; X1.B13 8.99,41.06 ; X1.B13 7.84,42.21 ; X1.B13 6.69,41.06 ; X1.B13 7.84,39.91 ; X1.B10 8.99,33.44 ; X1.B10 6.69,33.44 ; X1.B10 7.84,34.59 ; 5.3,85.63 X1.A31 ; X1.A31 4.15,86.78 ; X1.A31 5.3,87.93 ; X1.A31 6.45,86.78 ; 6.69,18.2 X1.B4 ; X1.B4 7.84,19.35 ; X1.B4 8.99,18.2 ; X1.B4 7.84,17.05 ; X1.B14 8.99,43.6 ; X1.B14 6.69,43.6 ; X1.B14 7.84,42.45 ; X1.B14 7.84,44.75 ; X1.B1 7.84,11.73 ; X1.B1 7.84,9.43 ; X1.B1 8.99,10.58 ; X1.B1 6.69,10.58 ; C3.2 7.03,106.19 ; C3.2 5.3,105.26 ; C3.2 5.3,107.11 ; C3.2 3.57,106.19 ; 4.42,101.25 VD1.A ; VD1.A 5.82,102.66 ; VD1.A 4.42,104.06 ; VD1.A 3.02,102.66 ; 6.69,35.98 X1.B11 ; X1.B11 8.99,35.98 ; X1.B11 7.84,34.83 ; X1.B11 7.84,37.13 ; 6.69,79.16 X1.B28 ; X1.B28 8.99,79.16 ; X1.B28 7.84,78.01 ; X1.B28 7.84,80.31 ; X1.B24 7.84,70.15 ; X1.B24 7.84,67.85 ; X1.B24 8.99,69 ; X1.B24 6.69,69 ; 13.05,206.16 C1.2 13.98,205.08
  BOTTOM w0.5: X1.B24 7.84,70.13 ; X1.B24 6.71,69 ; X1.B24 8.97,69 ; X1.B24 7.84,67.87 ; X1.B16 8.97,48.68 ; X1.B16 7.84,49.81 ; X1.B16 6.71,48.68 ; X1.B16 7.84,47.55 ; X1.B14 7.84,44.73 ; X1.B14 8.97,43.6 ; X1.B14 6.71,43.6 ; X1.B14 7.84,42.47 ; 22.32,55.24 AV13.4 21.19,55.92 ; 6.71,23.28 X1.B6 6.68,22.77 ; 21.19,25.44 AV16.4 22.32,24.76 ; C28.2 20.32,148.41 ; C28.2 19.42,147.36 ; C28.2 20.32,146.31 ; 6.71,13.12 X1.B2 ; X1.B2 8.97,13.12 ; X1.B2 7.84,11.99 ; 6.71,10.58 X1.B1 ; X1.B1 7.84,9.45 ; X1.B1 8.97,10.58 ; X1.B1 7.84,11.71 ; 7.84,50.09 X1.B17 ; X1.B17 8.97,51.22 ; X1.B17 6.71,51.22 ; X1.B17 7.84,52.35 ; 9.25,86.78 X1.C31 ; X1.C31 10.38,85.65 ; X1.C31 10.38,87.91 ; X1.C31 11.51,86.78 ; C34.2 20.32,81.74 ; C34.2 19.42,80.68 ; C34.2 20.32,79.63 ; 7.84,62.79 X1.B22 ; X1.B22 7.84,65.05 ; X1.B22 8.97,63.92 ; X1.B22 6.71,63.92 ; 6.71,86.78 X1.B31 ; X1.B31 8.97,86.78 ; X1.B31 7.84,85.65 ; X1.B31 7.84,87.91 ; C4.2 20.32,209.37 ; C4.2 19.42,208.32 ; C4.2 20.32,207.27 ; X1.B19 8.97,56.3 ; X1.B19 6.71,56.3 ; X1.B19 7.84,55.17 ; X1.B19 7.84,57.43 ; 7.84,78.03 X1.B28 ; X1.B28 7.84,80.29 ; X1.B28 6.71,79.16 ; X1.B28 8.97,79.16 ; X4.1 14.68,130.59 ; X4.1 12.43,130.59 ; X4.1 13.55,129.47 ; X4.1 13.55,131.72 ; 20.32,197.11 C10.2 ; C10.2 19.42,198.16 ; C10.2 20.32,199.21 ; X1.B20 8.97,58.84 ; X1.B20 7.84,59.97 ; X1.B20 6.71,58.84 ; X1.B20 7.84,57.71 ; 20.32,38.99 C46.2 ; C46.2 19.42,40.04 ; C46.2 20.32,41.1 ; 6.71,25.82 X1.B7 ; X1.B7 7.84,26.95 ; X1.B7 8.97,25.82 ; 7.84,72.95 X1.B26 ; X1.B26 8.97,74.08 ; X1.B26 6.71,74.08 ; X1.B26 7.84,75.21 ; 22.32,152.4 AV7.4 21.19,153.07 ; 6.71,35.98 X1.B11 ; X1.B11 8.97,35.98 ; X1.B11 7.84,37.11 ; X1.B11 7.84,34.85 ; 21.19,203.87 AV1.4 22.32,203.2 ; 19.42,60.36 C40.2 ; C40.2 20.32,59.31 ; C40.2 20.32,61.42 ; 19.42,137.2 C25.2 ; C25.2 20.32,136.15 ; C25.2 20.32,138.25 ; 22.32,65.4 22.32,66.08 21.19,66.08 ; 21.19,86.4 AV10.4 22.32,85.72 ; 13.55,133.14 14.71,133.14 ; 13.55,133.14 13.55,134.29 ; 13.55,133.14 12.4,133.14 ; 13.55,133.14 13.55,131.98 ; 6.71,18.2 X1.B4 6.68,17.69 ; 20.32,156.47 C22.2 ; C22.2 19.42,157.52 ; C22.2 20.32,158.57 ; 22.32,142.24 AV8.4 21.19,142.91 ; X1.B21 8.97,61.38 ; X1.B21 7.84,62.51 ; X1.B21 7.84,60.25 ; X1.B21 6.71,61.38 ; X1.B29 7.84,82.83 ; X1.B29 8.97,81.7 ; X1.B29 7.84,80.57 ; X1.B29 6.71,81.7 ; 22.32,182.88 AV4.4 21.19,183.55 ; X1.B13 7.84,42.19 ; X1.B13 7.84,39.93 ; X1.B13 8.97,41.06 ; X1.B13 6.71,41.06 ; 21.19,163.23 AV6.4 22.32,162.56 ; 22.32,75.56 AV11.4 21.19,76.24 ; 7.84,52.63 X1.B18 ; X1.B18 6.71,53.76 ; X1.B18 7.84,54.89 ; X1.B18 8.97,53.76 ; 6.68,20.23 X1.B5 6.71,20.74 ; 6.71,33.44 X1.B10 ; X1.B10 8.97,33.44 ; X1.B10 7.84,32.31 ; X1.B10 7.84,34.57 ; 21.19,132.75 AV9.4 22.32,132.08 ; 6.71,38.52 X1.B12 ; X1.B12 7.84,39.65 ; X1.B12 8.97,38.52 ; X1.B12 7.84,37.39 ; 6.71,71.54 X1.B25 ; X1.B25 7.84,72.67 ; X1.B25 8.97,71.54 ; X1.B25 7.84,70.41 ; X1.B27 8.97,76.62 ; X1.B27 6.71,76.62 ; X1.B27 7.84,75.49 ; X1.B27 7.84,77.75 ; X1.A31 6.43,86.78 ; X1.A31 4.17,86.78 ; X1.A31 5.3,87.91 ; X1.A31 5.3,85.65 ; 22.32,172.72 AV5.4 21.19,173.39 ; 19.42,90.84 C31.2 ; C31.2 20.32,89.79 ; C31.2 20.32,91.9 ; 21.19,193.71 AV3.4 22.32,193.04 ; 21.19,45.76 22.32,45.76 22.32,45.08 ; X1.B30 7.84,85.37 ; X1.B30 8.97,84.24 ; X1.B30 7.84,83.11 ; X1.B30 6.71,84.24 ; C19.2 20.32,168.73 ; C19.2 19.42,167.68 ; C19.2 20.32,166.63 ; 20.32,69.47 C37.2 ; C37.2 20.32,71.58 ; C37.2 19.42,70.52 ; 6.71,15.66 X1.B3 6.68,15.15 ; 19.42,177.84 C16.2 ; C16.2 20.32,176.79 ; C16.2 20.32,178.89 ; 22.32,95.88 AV2.4 21.19,96.56 ; 7.84,29.77 X1.B9 ; X1.B9 7.84,32.03 ; X1.B9 6.71,30.9 ; X1.B9 8.97,30.9 ; 7.84,65.33 X1.B23 ; X1.B23 8.97,66.46 ; X1.B23 6.71,66.46 ; X1.B23 7.84,67.59 ; 22.32,34.92 AV15.4 21.19,35.6 ; C43.2 20.32,51.26 ; C43.2 19.42,50.2 ; C43.2 20.32,49.15 ; 6.71,46.14 X1.B15 ; X1.B15 7.84,47.27 ; X1.B15 8.97,46.14 ; X1.B15 7.84,45.01 ; 7.84,27.23 X1.B8 ; X1.B8 8.97,28.36 ; X1.B8 7.84,29.49 ; X1.B8 6.71,28.36 ; 20.32,28.83 C49.2 ; C49.2 20.32,30.94 ; C49.2 19.42,29.88 ; 19.42,101 C7.2 ; C7.2 20.32,102.06 ; C7.2 20.32,99.95 ; C13.2 20.32,189.05 ; C13.2 19.42,188 ; C13.2 20.32,186.95
  vias: v1(2.12,211.88) v1(2.12,206.16) v1(2.12,195.37) v1(2.12,183.94) v1(2.12,161.08) v1(2.12,140.76) v1(2.12,127.42) v1(2.12,111.55) v1(2.12,103.29) v1(2.12,97.58) v1(2.12,91.22) v1(2.12,78.52) v1(2.12,65.83) v1(2.12,52.49) v1(2.12,39.16) v1(2.12,23.91) v1(2.12,8.68) v1(3.39,173.78) v1(3.39,152.82) v1(4.67,190.92) v1(4.67,182.67) v1(4.67,163.62) v1(4.67,143.3) v1(4.67,133.77) v1(4.67,125.52) v1(4.9,121.08) v1(5.3,107.73) v1(5.93,200.45) v1(5.93,98.21) v1(5.93,6.77) v1(6.57,207.43) v1(6.57,102.66) v1(7.21,189.02) v1(7.21,182.67) v1(7.21,110.91) v1(7.84,179.49) v1(7.84,173.14) v1(8.47,211.88) v1(8.47,169.97) v1(8.47,163.62) v1(9.11,160.44) v1(9.11,154.09) v1(9.75,150.92) v1(9.75,143.3) v1(9.75,133.77) v1(9.75,125.52) v1(9.75,121.7) v1(9.75,117.26) v1(9.75,98.21) v1(11.02,107.1) v1(11.02,102.66) v1(11.02,92.75) v1(11.65,208.07) v1(11.65,201.72) v1(11.65,6.77) v1(12.29,147.11) v1(12.29,143.3) v1(12.29,136.94) v1(12.92,195.37) v1(12.92,185.21) v1(12.92,175.05) v1(12.92,164.89) v1(12.92,154.09) v1(13.25,120.29) v1(13.55,13.12) v1(14.19,9.31) v1(14.82,211.88) v1(15.46,126.78) v1(16.09,201.97) v1(16.09,191.56) v1(16.09,181.4) v1(16.09,171.24) v1(16.09,161.08) v1(16.09,150.92) v1(16.09,140.76) v1(16.09,114.72) v1(16.09,6.77) v1(17.36,206.8) v1(17.36,196.64) v1(17.36,186.48) v1(17.36,176.32) v1(17.36,166.16) v1(17.36,156) v1(17.36,145.84) v1(17.36,135.68) v1(17.36,99.48) v1(17.36,89.32) v1(17.36,79.16) v1(17.36,69) v1(17.36,58.84) v1(17.7,48.98) v1(18,17.57) v1(18.3,38.75) v1(18.8,103.08) v1(19.3,129.58) v1(19.27,125.52) v1(19.27,114.72) v1(19.7,121.58) v1(19.91,211.88) v1(22.45,211.24) v1(22.45,201.08) v1(22.45,190.92) v1(22.45,180.76) v1(22.45,170.6) v1(22.45,160.44) v1(22.45,150.28) v1(22.45,140.12) v1(22.45,123.61) v1(22.45,103.92) v1(22.45,93.77) v1(22.45,83.61) v1(22.45,73.45) v1(22.45,63.28) v1(22.45,53.12) v1(22.45,42.96) v1(22.45,32.8) v1(22.45,16.93) v1(22.45,10.58) v1(22.45,6.77)
+24BE: length 341.8
  TOP w0.4: DA1.5 DA1.1 arc(14.73,120.44) 14.55,120.71 14.48,120.78 arc(14.27,121.1) 14.19,121.48 C12.1 ; C2.2 13.98,209.76 arc(14.04,209.91) 14.19,209.97 ; C9.2 21.39,21.8 21.18,22.01 21.18,22.64
  TOP w0.5: X1.B32 X1.A32 5.3,90.84 arc(5.49,91.29) 5.93,91.48 7.84,91.48 ; X1.B32 7.84,91.48 ; X1.B32 X1.C32 10.38,90.84 arc(10.19,91.29) 9.75,91.48 7.84,91.48 ; C3.1 6.76,109.28 arc(7.14,109.21) 7.46,108.99 7.84,108.61
  TOP w1: 21.18,22.64 v1(21.18,31.53) 20.83,31.88 arc(20.62,32.2) 20.54,32.58 20.54,33.03 arc(20.62,33.41) 20.83,33.73 20.88,33.78 arc(21.1,34.11) 21.18,34.49 v1(21.18,41.7) 20.83,42.04 arc(20.62,42.36) 20.54,42.74 20.54,43.19 arc(20.62,43.57) 20.83,43.89 20.88,43.94 arc(21.1,44.27) 21.18,44.65 v1(21.18,51.85) 20.83,52.2 arc(20.62,52.52) 20.54,52.9 20.54,53.35 arc(20.62,53.73) 20.83,54.05 20.88,54.1 arc(21.1,54.43) 21.18,54.81 v1(21.18,62.02) 20.83,62.36 arc(20.62,62.68) 20.54,63.06 20.54,63.51 arc(20.62,63.89) 20.83,64.21 20.88,64.26 arc(21.1,64.59) 21.18,64.97 v1(21.18,72.17) 20.83,72.52 arc(20.62,72.84) 20.54,73.22 20.54,73.67 arc(20.62,74.05) 20.83,74.37 20.88,74.42 arc(21.1,74.75) 21.18,75.13 v1(21.18,82.33) 20.83,82.68 arc(20.62,83) 20.54,83.38 20.54,83.83 arc(20.62,84.21) 20.83,84.53 20.88,84.58 arc(21.1,84.91) 21.18,85.29 v1(21.18,92.5) 20.83,92.84 arc(20.62,93.16) 20.54,93.54 20.54,93.99 arc(20.62,94.37) 20.83,94.69 20.88,94.74 arc(21.1,95.07) 21.18,95.45 v1(21.18,102.66) 20.83,103 arc(20.62,103.32) 20.54,103.7 20.54,104.15 arc(20.62,104.53) 20.83,104.85 20.88,104.9 arc(21.1,105.23) 21.18,105.61 21.18,121.93 arc(21.1,122.31) 20.88,122.63 19.93,123.59 19.93,123.63 ; 19.93,123.63 20.88,124.59 arc(21.1,124.91) 21.18,125.29 v1(21.18,138.85) 20.83,139.19 arc(20.62,139.52) 20.54,139.9 20.54,140.34 arc(20.62,140.72) 20.83,141.05 20.88,141.1 arc(21.1,141.42) 21.18,141.8 v1(21.18,149.01) 20.83,149.35 arc(20.62,149.68) 20.54,150.06 20.54,150.5 arc(20.62,150.88) 20.83,151.21 20.88,151.26 arc(21.1,151.58) 21.18,151.96 v1(21.18,159.17) 20.83,159.51 arc(20.62,159.84) 20.54,160.22 20.54,160.66 arc(20.62,161.04) 20.83,161.37 20.88,161.42 arc(21.1,161.74) 21.18,162.12 v1(21.18,169.33) 20.83,169.67 arc(20.62,170) 20.54,170.38 20.54,170.82 arc(20.62,171.2) 20.83,171.53 20.88,171.58 arc(21.1,171.9) 21.18,172.28 v1(21.18,179.49) 20.83,179.83 arc(20.62,180.16) 20.54,180.54 20.54,180.98 arc(20.62,181.36) 20.83,181.69 20.88,181.74 arc(21.1,182.06) 21.18,182.44 v1(21.18,189.65) 20.83,189.99 arc(20.62,190.32) 20.54,190.7 20.54,191.14 arc(20.62,191.52) 20.83,191.85 20.88,191.9 arc(21.1,192.22) 21.18,192.6 v1(21.18,199.81) 20.83,200.15 arc(20.62,200.48) 20.54,200.86 20.54,201.3 arc(20.62,201.68) 20.83,202.01 20.88,202.06 arc(21.1,202.38) 21.18,202.76 v1(21.18,209.97) 14.19,209.97 ; 19.93,123.63 19.93,123.68 14.19,123.68 ; 14.19,123.68 5.71,123.68 arc(5.33,123.61) 5.01,123.39 3.69,122.07 arc(3.47,121.75) 3.39,121.36 UNK+24BE.1 5.01,111.84 arc(5.22,111.51) 5.3,111.13 C3.1 ; 14.19,123.68 C12.1 ; 7.84,91.48 7.84,99.43 arc(7.92,99.81) 8.13,100.14 8.43,100.43 arc(8.64,100.76) 8.72,101.14 VD1.C 8.72,107.32 arc(8.64,107.7) 8.43,108.03 7.84,108.61
  BOTTOM w0.4: v1(21.18,102.66) 21.73,102.1 arc(21.95,101.77) 22.03,101.39 C7.1 22.03,99.81 arc(22.1,99.43) 22.32,99.1 22.32,99.1 ; AV8.6 22.32,145.46 arc(22.1,145.78) 22.03,146.16 C28.1 22.03,147.75 arc(21.95,148.13) 21.73,148.45 v1(21.18,149.01) ; v1(21.18,159.17) 21.73,158.61 arc(21.95,158.29) 22.03,157.91 C22.1 22.03,156.32 arc(22.1,155.94) 22.32,155.62 AV7.6 ; v1(21.18,138.85) 21.73,138.29 arc(21.95,137.97) 22.03,137.59 C25.1 22.03,136 arc(22.1,135.62) 22.32,135.3 AV9.6 ; v1(21.18,179.49) 21.73,178.93 arc(21.95,178.61) 22.03,178.23 C16.1 22.03,176.64 arc(22.1,176.26) 22.32,175.94 AV5.6 ; v1(21.18,199.81) 21.73,199.25 arc(21.95,198.93) 22.03,198.55 C10.1 22.03,196.96 arc(22.1,196.58) 22.32,196.26 AV3.6 ; AV16.6 22.32,27.98 arc(22.1,28.31) 22.03,28.69 C49.1 22.03,30.27 arc(21.95,30.65) 21.73,30.98 v1(21.18,31.53) ; v1(21.18,169.33) 21.73,168.77 arc(21.95,168.45) 22.03,168.07 C19.1 22.03,166.48 arc(22.1,166.1) 22.32,165.78 AV6.6 ; AV10.6 22.32,88.94 arc(22.1,89.27) 22.03,89.65 C31.1 22.03,91.23 arc(21.95,91.61) 21.73,91.94 v1(21.18,92.5) ; AV11.6 22.32,78.78 arc(22.1,79.11) 22.03,79.49 C34.1 22.03,81.07 arc(21.95,81.45) 21.73,81.78 v1(21.18,82.33) ; AV13.6 22.32,58.46 arc(22.1,58.79) 22.03,59.17 C40.1 22.03,60.75 arc(21.95,61.13) 21.73,61.46 v1(21.18,62.02) ; AV1.6 22.32,206.42 arc(22.1,206.74) 22.03,207.12 C4.1 22.03,208.71 arc(21.95,209.09) 21.73,209.41 v1(21.18,209.97) ; AV4.6 22.32,186.1 arc(22.1,186.42) 22.03,186.8 C13.1 22.03,188.39 arc(21.95,188.77) 21.73,189.09 v1(21.18,189.65) ; AV15.6 22.32,38.14 arc(22.1,38.47) 22.03,38.85 C46.1 22.03,40.43 arc(21.95,40.81) 21.73,41.14 v1(21.18,41.7) ; AV12.6 22.32,68.62 arc(22.1,68.95) 22.03,69.33 C37.1 22.03,70.91 arc(21.95,71.29) 21.73,71.62 v1(21.18,72.17) ; v1(21.18,51.85) 21.73,51.3 arc(21.95,50.97) 22.03,50.59 C43.1 22.03,49.01 arc(22.1,48.63) 22.32,48.3 AV14.6
+IN1: length 3.3
  TOP w1.27: 89.32,208.32 X2.1
  BOTTOM w1.27: 89.4,208.32 X2.1
+IN2: length 3.3
  TOP w1.27: 89.4,198.16 X2.3
  BOTTOM w1.27: 89.4,198.16 X2.3
+IN3: length 3.3
  TOP w1.27: 89.4,188 X2.5
  BOTTOM w1.27: 89.4,188 X2.5
+IN4: length 3.3
  TOP w1.27: 89.4,177.84 X2.7
  BOTTOM w1.27: 89.4,177.84 X2.7
+IN5: length 3.3
  TOP w1.27: 89.4,167.68 X2.9
  BOTTOM w1.27: 89.4,167.68 X2.9
+IN6: length 3.3
  TOP w1.27: 89.4,157.52 X2.11
  BOTTOM w1.27: 89.4,157.52 X2.11
+IN7: length 3.3
  TOP w1.27: 89.4,147.36 X2.13
  BOTTOM w1.27: 89.4,147.36 X2.13
+IN8: length 3.3
  TOP w1.27: 89.4,137.2 X2.15
  BOTTOM w1.27: 89.4,137.2 X2.15
+IN9: length 3.3
  TOP w1.27: 89.4,101 X3.1
  BOTTOM w1.27: 89.4,101 X3.1
+IN10: length 3.3
  TOP w1.27: 89.4,90.84 X3.3
  BOTTOM w1.27: 89.4,90.84 X3.3
+IN11: length 3.3
  TOP w1.27: 89.4,80.68 X3.5
  BOTTOM w1.27: 89.4,80.68 X3.5
+IN12: length 3.3
  TOP w1.27: 89.4,70.52 X3.7
  BOTTOM w1.27: 89.4,70.52 X3.7
+IN13: length 3.3
  TOP w1.27: 89.4,60.36 X3.9
  BOTTOM w1.27: 89.4,60.36 X3.9
+IN14: length 3.3
  TOP w1.27: 89.4,50.2 X3.11
  BOTTOM w1.27: 89.4,50.2 X3.11
+IN15: length 3.3
  TOP w1.27: 89.4,40.04 X3.13
  BOTTOM w1.27: 89.4,40.04 X3.13
+IN16: length 3.3
  TOP w1.27: 89.4,29.88 X3.15
  BOTTOM w1.27: 89.4,29.88 X3.15
-IN1: length 1.7
  TOP w1.27: 89.32,203.24 X2.2
-IN2: length 1.6
  TOP w1.27: 89.4,193.08 X2.4
-IN3: length 1.6
  TOP w1.27: 89.4,182.92 X2.6
-IN4: length 1.6
  TOP w1.27: 89.4,172.76 X2.8
-IN5: length 1.6
  TOP w1.27: 89.4,162.6 X2.10
-IN6: length 1.6
  TOP w1.27: 89.4,152.44 X2.12
-IN7: length 1.6
  TOP w1.27: 89.4,142.28 X2.14
-IN8: length 1.6
  TOP w1.27: 89.4,132.12 X2.16
-IN9: length 1.6
  TOP w1.27: 89.4,95.92 X3.2
-IN10: length 1.6
  TOP w1.27: 89.4,85.76 X3.4
-IN11: length 1.6
  TOP w1.27: 89.4,75.6 X3.6
-IN12: length 1.6
  TOP w1.27: 89.4,65.44 X3.8
-IN13: length 1.6
  TOP w1.27: 89.4,55.28 X3.10
-IN14: length 1.6
  TOP w1.27: 89.4,45.12 X3.12
-IN15: length 1.6
  TOP w1.27: 89.4,34.96 X3.14
-IN16: length 1.6
  TOP w1.27: 89.4,24.8 X3.16
_IN+_A1: length 20.8
  BOTTOM w0.35: R6.2 46.47,207.54 ; R6.2 44.67,206.54 ; R6.2 44.67,208.55 ; R6.2 42.87,207.54 ; VD6.C 48.48,208.77 ; VD6.C 49.96,207.29 ; VD6.C 47,207.29 ; C5.1 59.36,206.64 ; C5.1 58,207.72 ; C5.1 56.65,206.64 ; R8.2 40.86,208.55 ; R8.2 40.86,206.54 ; R8.2 42.66,207.54 ; 37.93,206.84 VD5.C 37.19,206.84
_IN+_A1_B1: length 21.3
  BOTTOM w0.5: R18.2 51.02,198.49 ; R18.2 49.12,197.38 ; R18.2 52.92,197.38 ; R18.2 51.02,196.28 ; 58,197.66 C11.1 59.46,196.48 ; 54.83,196.28 R19.2 ; R19.2 52.93,197.38 ; R19.2 54.83,198.49 ; VD18.C 48.79,197.13 ; VD18.C 47.21,198.71 ; VD18.C 45.63,197.13 ; 39.51,196.58 VD15.C 37.93,196.58
_IN+_A1_B2: length 21.3
  BOTTOM w0.5: VD48.C 47.21,137.75 ; VD48.C 48.79,136.17 ; VD48.C 45.63,136.17 ; R54.2 51.02,137.53 ; R54.2 51.02,135.32 ; R54.2 49.12,136.42 ; R54.2 52.92,136.42 ; 37.93,135.62 VD45.C 39.51,135.62 ; 59.46,135.52 C29.1 58,136.7 ; 52.93,136.42 R55.2 ; R55.2 54.83,135.32 ; R55.2 54.83,137.53
_IN+_A1_B8: length 20.8
  BOTTOM w0.5: 37.93,186.52 VD20.C 37.19,186.52 ; C14.1 59.36,186.32 ; C14.1 56.65,186.32 ; C14.1 58,187.4 ; 44.67,186.22 R24.2 ; R24.2 44.67,188.23 ; R24.2 46.47,187.22 ; R24.2 42.87,187.22 ; 40.86,186.22 R25.2 ; R25.2 42.66,187.22 ; R25.2 40.86,188.23 ; 47,186.97 VD23.C ; VD23.C 49.96,186.97 ; VD23.C 48.48,188.45
_IN+_A1_B9: length 21.3
  BOTTOM w0.5: VD28.C 47.21,178.39 ; VD28.C 45.63,176.81 ; VD28.C 48.79,176.81 ; 51.02,175.96 R30.2 ; R30.2 52.92,177.06 ; R30.2 49.12,177.06 ; R30.2 51.02,178.17 ; 39.51,176.26 VD25.C 37.93,176.26 ; 54.83,175.96 R31.2 ; R31.2 54.83,178.17 ; R31.2 52.93,177.06 ; 58,177.34 C17.1 59.46,176.16
_IN+_A1_B10: length 20.8
  BOTTOM w0.5: R36.2 44.67,167.91 ; R36.2 44.67,165.9 ; R36.2 42.87,166.9 ; R36.2 46.47,166.9 ; 40.86,165.9 R37.2 ; R37.2 40.86,167.91 ; R37.2 42.66,166.9 ; 56.65,166 C20.1 ; C20.1 58,167.08 ; C20.1 59.36,166 ; 47,166.65 VD33.C ; VD33.C 49.96,166.65 ; VD33.C 48.48,168.13 ; 37.93,166.2 VD30.C 37.19,166.2
_IN+_A1_B11: length 21.3
  BOTTOM w0.5: 52.93,156.74 R43.2 ; R43.2 54.83,155.64 ; R43.2 54.83,157.85 ; R42.2 52.92,156.74 ; R42.2 49.12,156.74 ; R42.2 51.02,157.85 ; R42.2 51.02,155.64 ; 37.93,155.94 VD35.C 39.51,155.94 ; 58,157.02 C23.1 59.46,155.84 ; VD38.C 48.79,156.49 ; VD38.C 45.63,156.49 ; VD38.C 47.21,158.07
_IN+_A1_B12: length 20.8
  BOTTOM w0.5: 42.87,146.58 R48.2 ; R48.2 44.67,147.59 ; R48.2 46.47,146.58 ; R48.2 44.67,145.58 ; 37.93,145.88 VD40.C 37.19,145.88 ; VD43.C 48.48,147.81 ; VD43.C 49.96,146.33 ; VD43.C 47,146.33 ; R49.2 42.66,146.58 ; R49.2 40.86,145.58 ; R49.2 40.86,147.59 ; 56.65,145.68 C26.1 ; C26.1 58,146.76 ; C26.1 59.36,145.68
_IN+_A2: length 20.8
  BOTTOM w0.5: 44.67,99.23 R12.2 ; R12.2 46.47,100.23 ; R12.2 44.67,101.23 ; R12.2 42.87,100.23 ; VD11.C 48.48,101.46 ; VD11.C 49.96,99.98 ; VD11.C 47,99.98 ; 40.86,99.23 R14.2 ; R14.2 40.86,101.23 ; R14.2 42.66,100.23 ; C8.1 59.36,99.33 ; C8.1 56.65,99.33 ; C8.1 58,100.41 ; 37.93,99.53 VD10.C 37.19,99.53
_IN+_A2_B1: length 21.3
  BOTTOM w0.5: R60.2 52.92,90.07 ; R60.2 51.02,88.97 ; R60.2 51.02,91.17 ; R60.2 49.12,90.07 ; 58,90.35 C32.1 59.46,89.17 ; 45.63,89.82 VD53.C ; VD53.C 47.21,91.4 ; VD53.C 48.79,89.82 ; 39.51,89.27 VD50.C 37.93,89.27 ; 52.93,90.07 R61.2 ; R61.2 54.83,88.97 ; R61.2 54.83,91.17
_IN+_A2_B2: length 21.3
  BOTTOM w0.5: 52.93,29.11 R97.2 ; R97.2 54.83,28.01 ; R97.2 54.83,30.21 ; 37.93,28.31 VD80.C 39.51,28.31 ; 49.12,29.11 R96.2 ; R96.2 51.02,30.21 ; R96.2 52.92,29.11 ; R96.2 51.02,28.01 ; 45.63,28.86 VD83.C ; VD83.C 48.79,28.86 ; VD83.C 47.21,30.44 ; 59.46,28.21 C50.1 58,29.39
_IN+_A2_B8: length 20.8
  BOTTOM w0.5: 40.86,79.91 40.86,80.91 ; 40.86,79.91 42.66,79.91 ; 40.86,79.91 40.86,78.91 ; C35.1 59.36,79.01 ; C35.1 58,80.09 ; C35.1 56.65,79.01 ; VD58.C 48.48,81.14 ; VD58.C 49.96,79.66 ; VD58.C 47,79.66 ; 44.67,79.91 46.47,79.91 ; 44.67,79.91 44.67,78.91 ; 44.67,79.91 44.67,80.91 ; 44.67,79.91 42.87,79.91 ; 37.93,79.21 VD55.C 37.19,79.21
_IN+_A2_B9: length 21.3
  BOTTOM w0.5: 54.83,68.65 R73.2 ; R73.2 52.93,69.75 ; R73.2 54.83,70.85 ; VD63.C 48.79,69.5 ; VD63.C 45.63,69.5 ; VD63.C 47.21,71.08 ; 51.02,68.65 R72.2 ; R72.2 51.02,70.85 ; R72.2 52.92,69.75 ; R72.2 49.12,69.75 ; 59.46,68.85 C38.1 58,70.03 ; 39.51,68.95 VD60.C 37.93,68.95
_IN+_A2_B10: length 20.8
  BOTTOM w0.5: R79.2 42.66,59.59 ; R79.2 40.86,58.59 ; R79.2 40.86,60.59 ; VD68.C 49.96,59.34 ; VD68.C 47,59.34 ; VD68.C 48.48,60.82 ; 37.19,58.89 VD65.C 37.93,58.89 ; R78.2 44.67,60.59 ; R78.2 42.87,59.59 ; R78.2 44.67,58.59 ; R78.2 46.47,59.59 ; C41.1 59.36,58.69 ; C41.1 58,59.77 ; C41.1 56.65,58.69
_IN+_A2_B11: length 21.3
  BOTTOM w0.5: 58,49.71 C44.1 59.46,48.53 ; R85.2 54.83,50.53 ; R85.2 54.83,48.33 ; R85.2 52.93,49.43 ; 49.12,49.43 R84.2 ; R84.2 51.02,50.53 ; R84.2 52.92,49.43 ; R84.2 51.02,48.33 ; 45.63,49.18 VD73.C ; VD73.C 48.79,49.18 ; VD73.C 47.21,50.76 ; 39.51,48.63 VD70.C 37.93,48.63
_IN+_A2_B12: length 20.8
  BOTTOM w0.5: 37.93,38.57 VD75.C 37.19,38.57 ; R90.2 46.47,39.27 ; R90.2 42.87,39.27 ; R90.2 44.67,40.27 ; R90.2 44.67,38.27 ; 40.86,38.27 R91.2 ; R91.2 42.66,39.27 ; R91.2 40.86,40.27 ; 47,39.02 VD78.C ; VD78.C 48.48,40.5 ; VD78.C 49.96,39.02 ; C47.1 59.36,38.37 ; C47.1 58,39.45 ; C47.1 56.65,38.37
_IN-_A1: length 15.7
  BOTTOM w0.35: 40.86,203.67 R8.1 42.59,202.74 ; 56.73,203.64 C5.2 58,202.64 ; 38.18,202.15 R9.2 ; R9.2 39.11,203.87 ; R9.2 37.25,203.87 ; R6.1 46.4,202.74 ; R6.1 44.67,203.67 ; R6.1 42.94,202.74 ; 47.08,202.99 VD6.A 49.88,202.99
_IN-_A1_B1: length 17.4
  BOTTOM w0.5: R21.2 39.11,193.71 ; R21.2 38.18,191.99 ; R21.2 37.25,193.71 ; R19.1 56.56,192.58 ; R19.1 54.83,193.51 ; R19.1 53.1,192.58 ; 58,192.48 C11.2 56.73,193.48 ; 49.29,192.58 R18.1 ; R18.1 51.02,193.51 ; R18.1 52.75,192.58 ; 45.81,192.83 VD18.A 48.61,192.83
_IN-_A1_B2: length 17.4
  BOTTOM w0.5: 49.29,131.62 R54.1 ; R54.1 51.02,132.55 ; R54.1 52.75,131.62 ; 48.61,131.87 VD48.A 45.81,131.87 ; 38.18,131.03 R57.2 ; R57.2 39.11,132.75 ; R57.2 37.25,132.75 ; R55.1 54.83,132.55 ; R55.1 53.1,131.62 ; R55.1 56.56,131.62 ; 58,131.52 C29.2 56.73,132.52
_IN-_A1_B8: length 15.7
  BOTTOM w0.5: 42.59,182.42 R25.1 40.86,183.35 ; 38.18,181.83 R27.2 ; R27.2 37.25,183.55 ; R27.2 39.11,183.55 ; R24.1 46.4,182.42 ; R24.1 44.67,183.35 ; R24.1 42.94,182.42 ; 58,182.32 C14.2 56.73,183.32 ; 47.08,182.67 VD23.A 49.88,182.67
_IN-_A1_B9: length 17.4
  BOTTOM w0.5: 37.25,173.39 R33.2 ; R33.2 39.11,173.39 ; R33.2 38.18,171.67 ; R30.1 52.75,172.26 ; R30.1 51.02,173.19 ; R30.1 49.29,172.26 ; R31.1 56.56,172.26 ; R31.1 54.83,173.19 ; R31.1 53.1,172.26 ; 48.61,172.51 VD28.A 45.81,172.51 ; 56.73,173.16 C17.2 58,172.16
_IN-_A1_B10: length 15.7
  BOTTOM w0.5: 42.94,162.1 R36.1 ; R36.1 46.4,162.1 ; R36.1 44.67,163.03 ; 58,162 C20.2 56.73,163 ; 37.25,163.23 R39.2 ; R39.2 38.18,161.51 ; R39.2 39.11,163.23 ; 40.86,163.03 R37.1 42.59,162.1 ; 49.88,162.35 VD33.A 47.08,162.35
_IN-_A1_B11: length 17.4
  BOTTOM w0.5: R45.2 39.11,153.07 ; R45.2 38.18,151.35 ; R45.2 37.25,153.07 ; 58,151.84 C23.2 56.73,152.84 ; 53.1,151.94 R43.1 ; R43.1 54.83,152.87 ; R43.1 56.56,151.94 ; 48.61,152.19 VD38.A 45.81,152.19 ; R42.1 51.02,152.87 ; R42.1 52.75,151.94 ; R42.1 49.29,151.94
_IN-_A1_B12: length 15.7
  BOTTOM w0.5: 38.18,141.19 R51.2 ; R51.2 37.25,142.91 ; R51.2 39.11,142.91 ; 42.94,141.78 R48.1 ; R48.1 46.4,141.78 ; R48.1 44.67,142.71 ; 40.86,142.71 R49.1 42.59,141.78 ; 47.08,142.03 VD43.A 49.88,142.03 ; 58,141.68 C26.2 56.73,142.68
_IN-_A2: length 15.7
  BOTTOM w0.5: R12.1 46.4,95.43 ; R12.1 44.67,96.36 ; R12.1 42.94,95.43 ; R15.2 39.11,96.56 ; R15.2 38.18,94.83 ; R15.2 37.25,96.56 ; 49.88,95.68 47.08,95.68 ; 58,95.33 C8.2 56.73,96.33 ; 42.59,95.43 R14.1 40.86,96.36
_IN-_A2_B1: length 17.4
  BOTTOM w0.5: 53.1,85.27 R61.1 ; R61.1 56.56,85.27 ; R61.1 54.83,86.2 ; 49.29,85.27 R60.1 ; R60.1 52.75,85.27 ; R60.1 51.02,86.2 ; R63.2 39.11,86.4 ; R63.2 37.25,86.4 ; R63.2 38.18,84.67 ; 45.81,85.52 VD53.A 48.61,85.52 ; 56.73,86.17 C32.2 58,85.17
_IN-_A2_B2: length 17.4
  BOTTOM w0.5: 49.29,24.31 51.02,24.31 ; 51.02,24.31 51.02,25.24 ; 51.02,24.31 52.75,24.31 ; 58,24.21 58,25.21 56.73,25.21 ; 45.81,24.56 VD83.A 48.61,24.56 ; 54.83,24.31 54.83,25.24 ; 54.83,24.31 56.56,24.31 ; 54.83,24.31 53.1,24.31 ; R99.2 39.11,25.44 ; R99.2 37.25,25.44 ; R99.2 38.18,23.71
_IN-_A2_B8: length 15.7
  BOTTOM w0.5: R66.1 44.67,76.04 ; R66.1 46.4,75.11 ; R66.1 42.94,75.11 ; 58,75.01 C35.2 56.73,76.01 ; 42.59,75.11 R67.1 40.86,76.04 ; 38.18,74.51 R69.2 ; R69.2 37.25,76.24 ; R69.2 39.11,76.24 ; 49.88,75.36 VD58.A 47.08,75.36
_IN-_A2_B9: length 17.4
  BOTTOM w0.35: 56.73,65.85 C38.2 58,64.85 ; R72.1 51.02,65.88 ; R72.1 52.75,64.95 ; R72.1 49.29,64.95 ; 45.81,65.2 VD63.A 48.61,65.2 ; R75.2 39.11,66.08 ; R75.2 37.25,66.08 ; R75.2 38.18,64.35 ; R73.1 54.83,65.88 ; R73.1 56.56,64.95 ; R73.1 53.1,64.95
_IN-_A2_B10: length 15.7
  BOTTOM w0.5: 49.88,55.04 VD68.A 47.08,55.04 ; 42.59,54.79 R79.1 40.86,55.72 ; 42.94,54.79 R78.1 ; R78.1 46.4,54.79 ; R78.1 44.67,55.72 ; 56.73,55.69 C41.2 58,54.69 ; 38.18,54.19 R81.2 ; R81.2 39.11,55.92 ; R81.2 37.25,55.92
_IN-_A2_B11: length 17.4
  BOTTOM w0.5: 56.73,45.53 C44.2 58,44.53 ; R84.1 51.02,45.56 ; R84.1 49.29,44.63 ; R84.1 52.75,44.63 ; R85.1 54.83,45.56 ; R85.1 56.56,44.63 ; R85.1 53.1,44.63 ; 48.61,44.88 VD73.A 45.81,44.88 ; R87.2 39.11,45.76 ; R87.2 38.18,44.03 ; R87.2 37.25,45.76
